# Altium PCB PCB1.PcbDoc
Units mil, origin at the board's own origin, x right, y up, seen from the top; angles counter-clockwise.
Board outline 570 x 455 mil, 2 copper layers (Top Layer, Bottom Layer); 7 components, 5 nets, 21 pads, 6 vias.
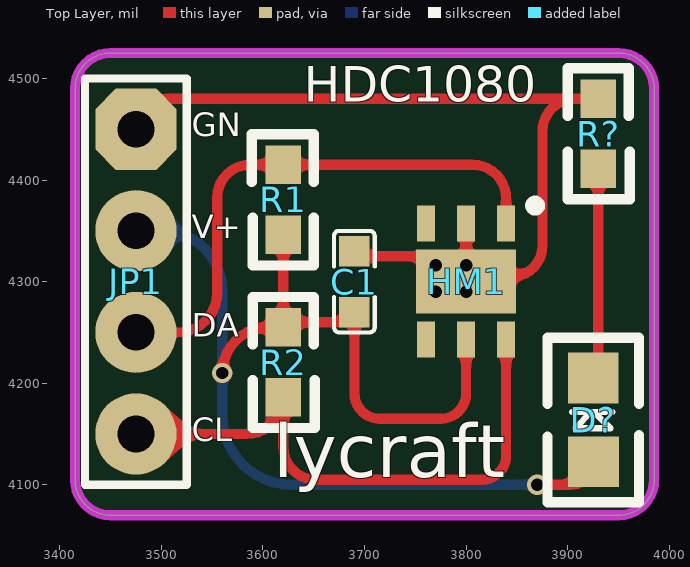
[diagram p0: Top Layer view]
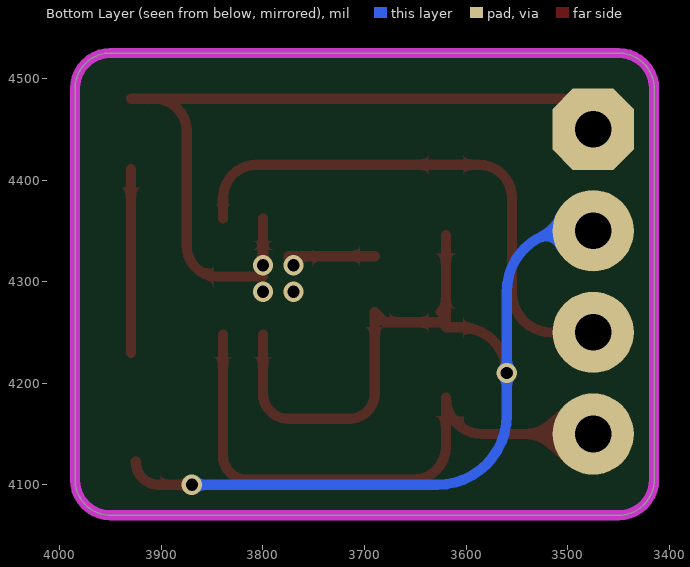
[diagram p1: Bottom Layer view, seen from below]
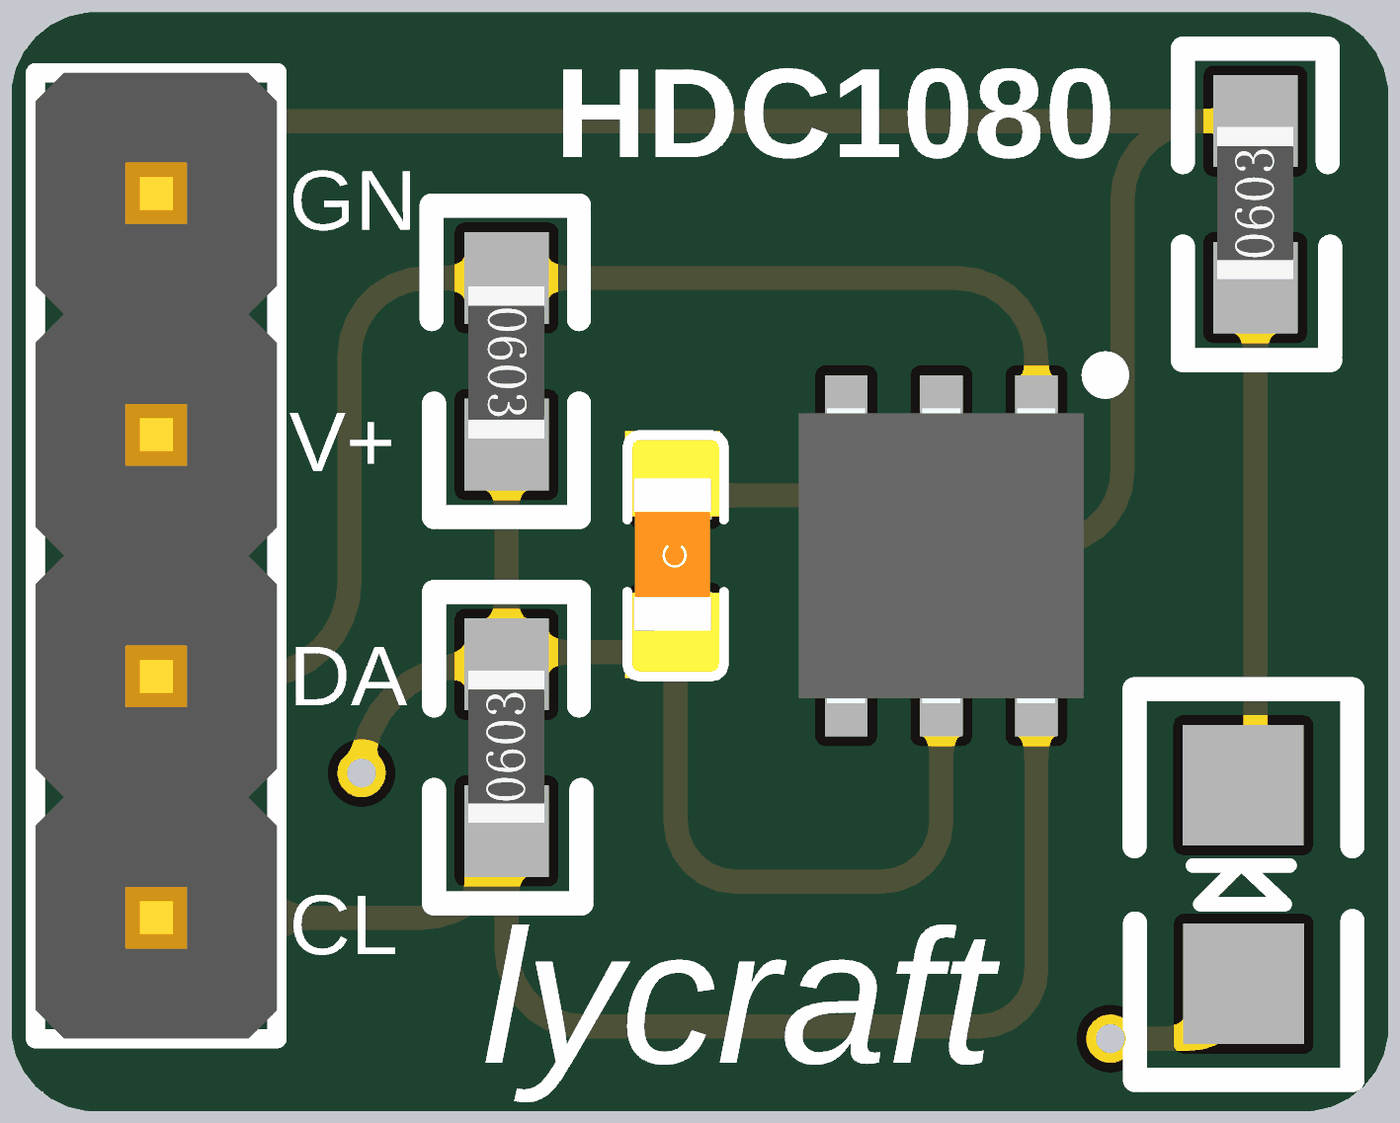
[diagram p2: 3D render of the assembled board from above, using the file's embedded part models]

## Layer stack, top to bottom
Top Solder: solder mask 0.4, Solder Resist, Dk 3.5
Top Layer: signal copper 1.4
Dielectric 1: dielectric 12.6, FR-4, Dk 4.8
Bottom Layer: signal copper 1.4
Bottom Solder: solder mask 0.4, Solder Resist, Dk 3.5

## Board outline
3415,4105 3415,4490 cw(c3450,4490) 3450,4525 3950,4525 cw(c3950,4490) 3985,4490 3985,4105 cw(c3950,4105) 3950,4070 3450,4070 cw(c3450,4105)

## Design rules (kind name [scope] priority, off if disabled: settings)
Clearance [All] p1: gap=6 ignorepadtopadclearanceinfootprint=TRUE
PolygonConnect [All] p1: connectstyle=Relief reliefconductorwidth=10 reliefentries=4 polygonreliefangle="90 Angle" airgapwidth=10
RoutingVias [All] p1: holewidth=28 width=50 viastyle="Through Hole" minholewidth=28 minwidth=50 maxholewidth=28 maxwidth=50
SolderMaskExpansion [All] p1: expansion=4 istentingtop=FALSE
Width [All] p1: maxlimit=10 minlimit=10 preferedwidth=10
30 further rules are at their usual default settings.

## Components (designator, comment, footprint, x,y, rotation, side; value= is the part's Value field where it differs from the comment)
C1 "0.1uF" 0603_C 3690,4300 r90 top value=104
D? "LED" 0805LED 3925.2,4122.7 r90 top
HM1 "HDC1080DMBT" SON100P300X300X80-7N 3800,4300 r270 top
JP1 "header" header4 3475,4450 r270 top
R1 "4.9K" R0603 3620,4415 r270 top value=1K
R2 "4.9K" R0603 3620,4186 r90 top value=1K
R? "4.9K" R0603 3930,4411 r90 top value=1K

## Footprints (in the part's own frame and the unit in brackets; to place one, negate y for a bottom-side part, rotate by r counter-clockwise, add the part's x,y. Pads: shape width x height; smd on the part's side, far side on the other; paste and mask are expansions set on the pad)
0603_C [mil] "Capacitor"
  rect 30x30 smd: 1(-30,0) 2(30,0)
  silkscreen extent -50,-20 50,20, body extent -51,-18 52,21, height 35
0805LED [mil]
  rect 50x50 smd: 1(0,0) 2(82.3,0.2)
  silkscreen extent -40,-45 122,45, body extent 2,-25 80,25, height 20
header4 [mil]
  oct 80x80 hole 36: 1(0,0)
  round 80 hole 36: 2(100,0) 3(200,0) 4(300,0)
  silkscreen extent -50,-50 350,50, body extent -50,-50 350,50, height 398
R0603 [mil] "1/10W"
  rect 38x35 smd: 1(0,0) 2(69,0)
  silkscreen extent -30,-31 99,30, body extent 4,-16 66,16, height 18
SON100P300X300X80-7N [mm]
  rect 0.9x0.45 smd: 1(-1.45,1) 2(-1.45,0) 3(-1.45,-1) 4(1.45,-1) 5(1.45,0) 6(1.45,1)
  rect 1.6x2.5 smd: 7(0,0)
  silkscreen extent -2.02,1.6 -1.78,1.85, body extent -1.55,-1.5 1.55,1.5, height 0.8

## Part data
C1: library part CAP, "Capacitor", LatestRevisionDate=17-Jul-2002, LatestRevisionNote="Re-released for DXP Platform.", PackageReference=RAD-0.3, Published=8-Jun-2000, Publisher="Altium Limited"
D?: "LED 发光二极管"
HM1: "Hygrometer", Manufacturer_Name="Texas Instruments", Mouser Part Number=595-HDC1080DMBT, RS Part Number=1684955, Datasheet Link=http://www.mouser.com/ds/2/405/hdc1080-844688.pdf, Height=0.8mm, Manufacturer_Part_Number=HDC1080DMBT, Mouser Price/Stock=https://www.mouser.com/Search/Refine.aspx?Keyword=595-HDC1080DMBT, RS Price/Stock=https://uk.rs-online.com/web/p/products/1684955
JP1: library part "HEADER 4"
R1 R2 R?: library part RES, "Resistor", Published=8-Jun-2000, Publisher="Altium Limited", Revision="July-2002: Re-released for DXP Platform."

## Via types
v1: diameter 20, hole 12, Top Layer to Bottom Layer, 6 vias

## Nets (pads, with @x,y where several pads share a name; then routed paths per layer and width w, separated by ;. In a path a pad name is that pad's centre, name@x,y a point inside that pad or via, vN(x,y) a via of type N, cw(c..) or ccw(c..) an arc to the next point about the centre after c; other vN are vias at no path point)
GND: C1.2 HM1.2 HM1.7 JP1.1 R?.2 | length 861.5
  Top Layer w10: JP1.1 cw(c3505,4450) 3505,4480 3907.25,4480 ; C1.2@3690,4325 HM1.7@3775,4325 ; HM1.7@3798.21,4314.28 ccw(c3798.21,4316.07) v1(3800,4316.07) HM1.2@3800,4362.09 ; HM1.7@3800,4305 3845,4305 ccw(c3845,4335) 3875,4335 3875,4447.75 cw(c3907.25,4447.75) 3907.25,4480 ; R?.2 3907.25,4480
  other v1: 3770,4290 3800,4290 3770,4316.07
NetD?_2: D?.2 R?.1 | length 181
  Top Layer w10: 3930,4230 R?.1
SCL: HM1.6 JP1.4 R2.1 | length 584.8
  Top Layer w10: JP1.4 3584,4150 ccw(c3584,4186) R2.1 3620,4137.25 ccw(c3652.25,4137.25) 3652.25,4105 3815.65,4105 ccw(c3815.65,4128.72) 3839.37,4128.72 HM1.6@3839.37,4247.91
SDA: HM1.1 JP1.3 R1.1 | length 537.5
  Top Layer w10: JP1.3 3515.86,4250 ccw(c3515.86,4289.14) 3555,4289.14 3555,4382.75 cw(c3587.25,4382.75) 3587.25,4415 R1.1 3806.31,4415 cw(c3806.31,4381.94) 3839.37,4381.94 HM1.1@3839.37,4362.09
VCC: C1.1 D?.1 HM1.5 JP1.2 R1.2 R2.2 | length 1188.4
  Top Layer w10: v1(3560,4210) cw(c3605,4210) 3605,4255 R2.2 ; R1.2 R2.2@3620,4265 ; R2.2@3625,4270 ccw(c3625,4265) R2.2@3620,4265 ; HM1.5@3800,4247.91 3800,4190 cw(c3775,4190) 3775,4165 3715,4165 cw(c3715,4190) 3690,4190 C1.1 3680,4260 3620,4260 R2.2@3620,4265 ; v1(3870,4100) 3902.5,4100 ccw(c3902.5,4122.7) D?.1
  Bottom Layer w10: JP1.2 3500.5,4350 cw(c3500.5,4290.51) 3560,4290.51 v1(3560,4210) 3560,4168.28 ccw(c3628.28,4168.28) 3628.28,4100 v1(3870,4100)
pads on no net: HM1.3 HM1.4

## Polygon pours and split planes (outlines as drawn)
GND on Bottom Layer "Bottom Layer-GND" (solid, remove dead copper, shelved, pour order 6): 3265,4620 3280,4620 cw(c3280,4520) 3380,4520 3380,3970 cw(c3400,3970) 3400,3990 4225,3990 cw(c4225,4085) 4130,4085 4130,4635

## Keep-outs
Keep-Out Layer:
  the board outline again, w10

## Silkscreen, mask and mechanical layers (free items; w line width, h text height)
Top Overlay:
  text "HDC1080" at 3640,4465 h60
  text "GN" at 3530,4435 h40
  text "V+" at 3530,4335 h40
  text "DA" at 3530,4238 h40
  text "CL" at 3530,4135 h40
  text "lycraft" at 3610,4090 h90